# EAGLE board shield9Routed (EAGLE 8.7.1)
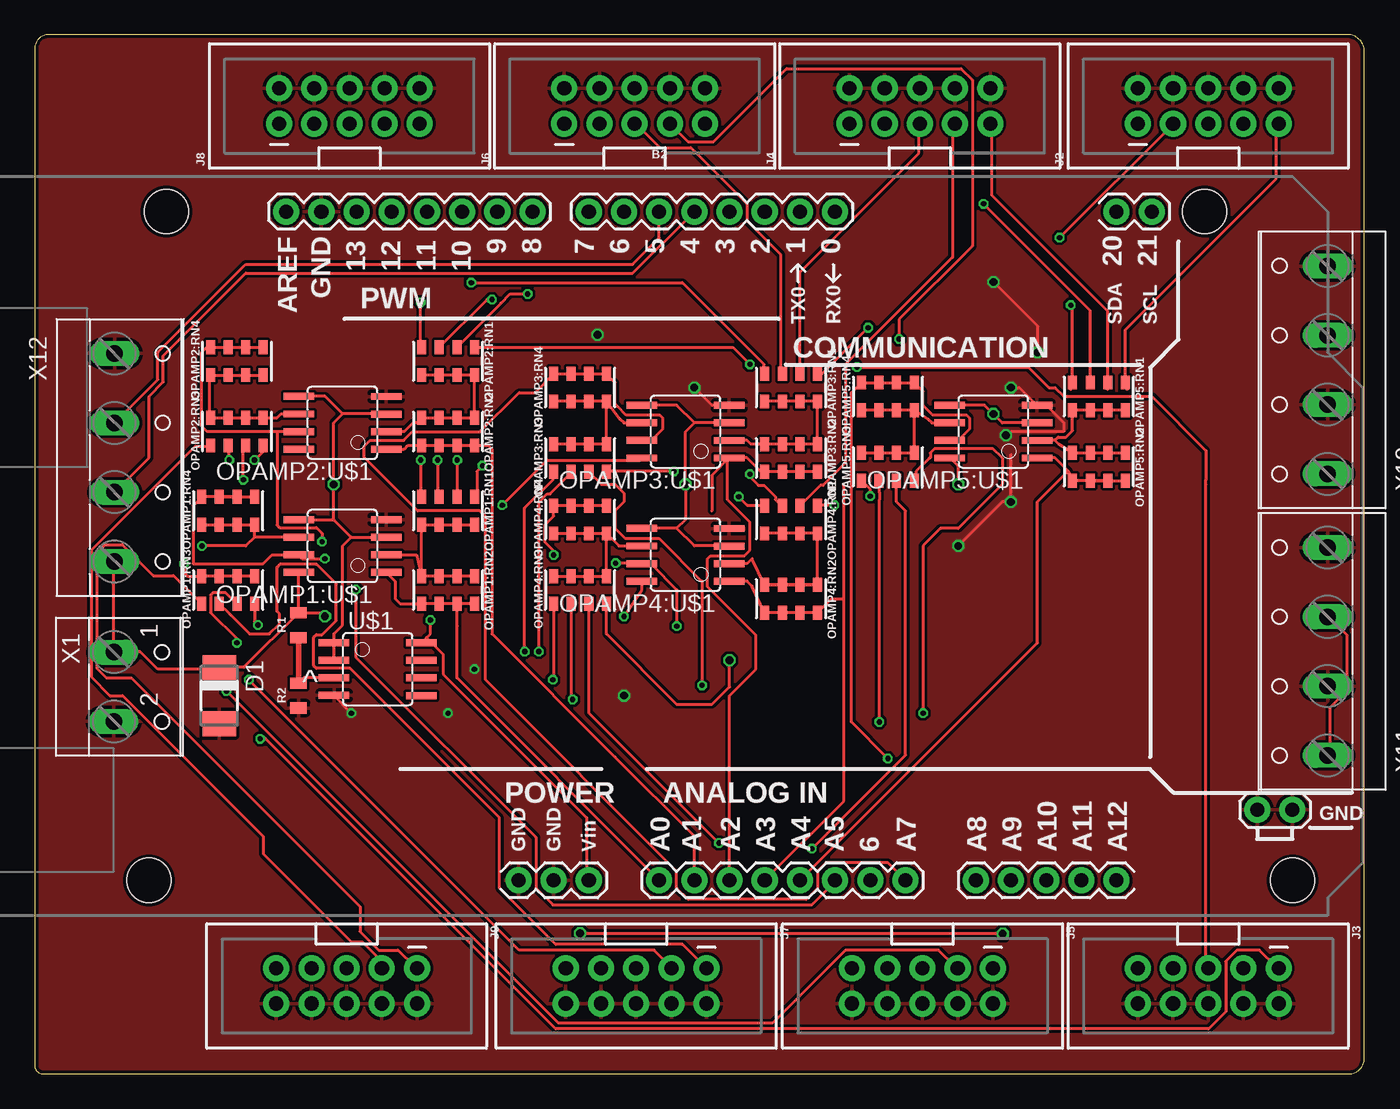
[diagram p0: board, top side]
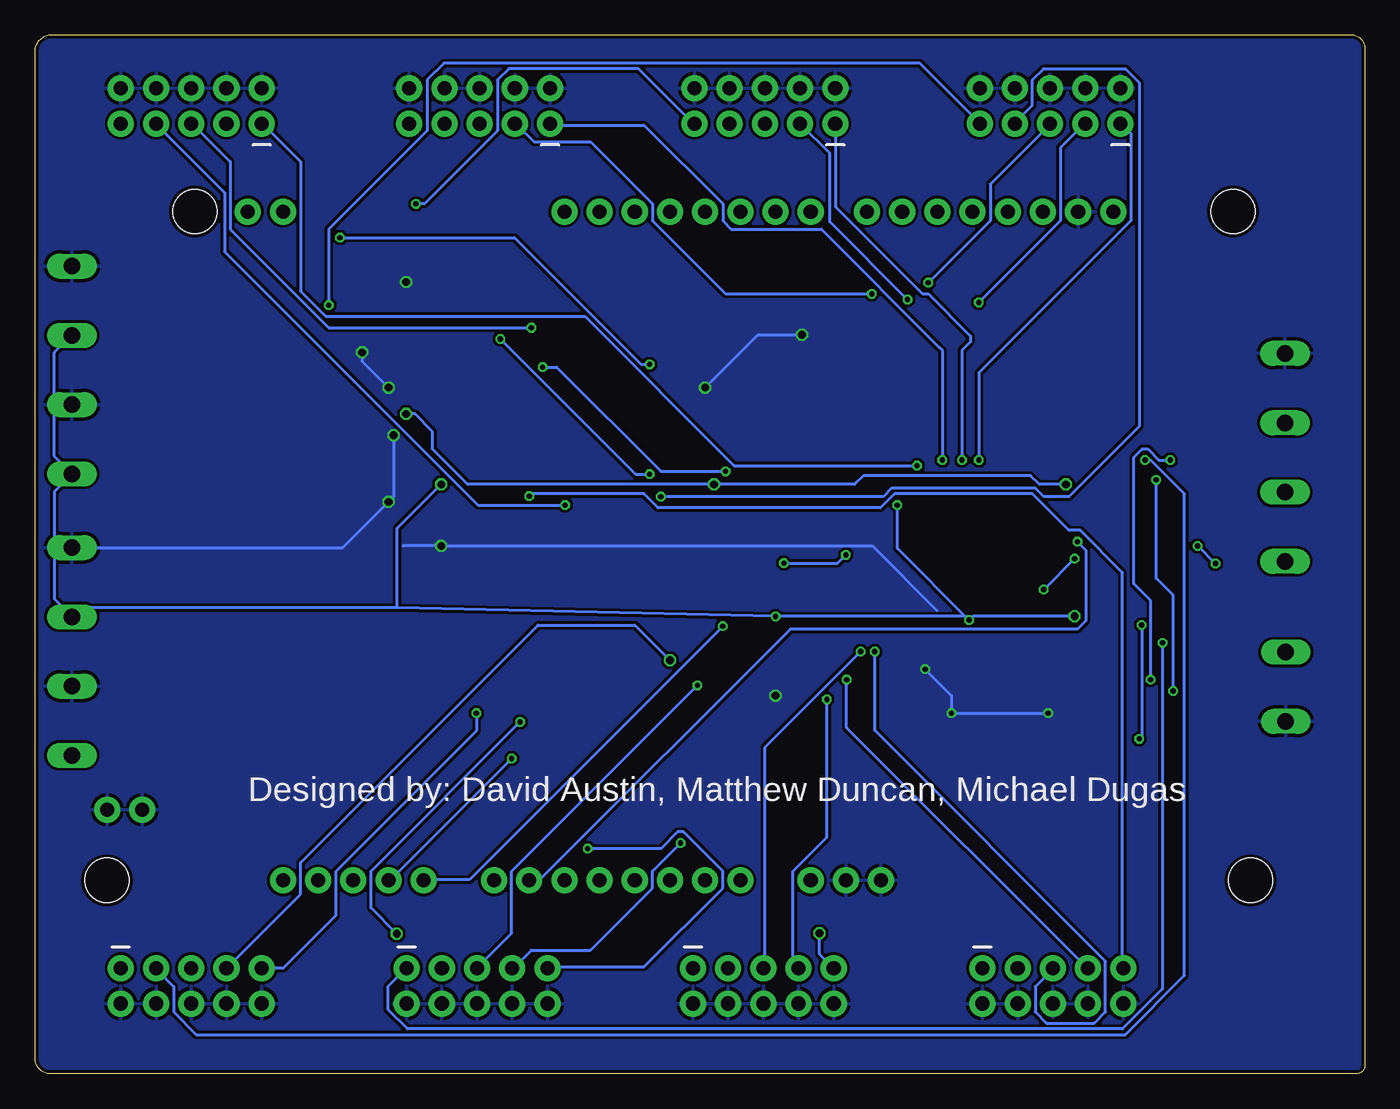
[diagram p1: board, bottom side, seen from below]

Size 96 x 75 mm. Coordinates in mm from the lower left corner, seen from the top.
Outline: 0,74 0,0.64 arc90 0.64,0 94.87,0 arc90 96,1.13 96,73.78 arc90 94.78,75 1,75 arc90 0,74
Copper layers (1*16): Top 0.035mm / dielectric 1.5mm / Bottom 0.035mm
Design rules "Dirty8TS *": minimum track width 5mil, minimum drill 12mil, track to track 8mil, track to pad 8mil, pad to pad 8mil, via to via 8mil, smd to smd 0mil, copper to edge 10mil, drill to drill 10mil, minimum pad ring 10mil, minimum via ring 6mil, stop-mask expansion 2mil, vias tented up to drill 25mil, thermal gap 10mil
Net classes: 0 default: width 0.203 mm, drill 0.381 mm, clearance 0.203 mm

## Footprints (pad centres in the part's own frame; a part is rotated, then mirrored left to right if it is on the bottom)
ARDUINO_MEGA_EDIT = drill 1.016 pad 1.88: 0 13.97,24.13; 1 11.43,24.13; 2 8.89,24.13; 3 6.35,24.13; 4 3.81,24.13; 5 1.27,24.13; 6 -1.27,24.13; 7 -3.81,24.13; 8 -7.874,24.13; 9 -10.414,24.13; 10 -12.954,24.13; 11 -15.494,24.13; 12 -18.034,24.13; 13 -20.574,24.13; 20 34.29,24.13; 21 36.83,24.13; A0 1.27,-24.13; A1 3.81,-24.13; A2 6.35,-24.13; A3 8.89,-24.13; A4 11.43,-24.13; A5 13.97,-24.13; A6 16.51,-24.13; A7 19.05,-24.13; A8 24.13,-24.13; A9 26.67,-24.13; A10 29.21,-24.13; A11 31.75,-24.13; A12 34.29,-24.13; AREF -25.654,24.13; GND@0 -8.89,-24.13; GND@1 -6.35,-24.13; GND@2 44.45,-19.05; GND@3 46.99,-19.05; GND@4 -23.114,24.13; VIN -3.81,-24.13 | hole 3.2: -34.29,24.13; -35.56,-24.13; 40.64,24.13; 46.99,-24.13
DO-214AC = smd 1.8 x 2.4: A 2.025,0; C -2.025,0
2X5-SHROUDED = drill 1.016 pad 1.88: 1 -1.27,5.08; 2 1.27,5.08; 3 -1.27,2.54; 4 1.27,2.54; 5 -1.27,0; 6 1.27,0; 7 -1.27,-2.54; 8 1.27,-2.54; 9 -1.27,-5.08; 10 1.27,-5.08
0805-ARV_EDIT10K = smd 0.65 x 1: 1 -1.905,-1; 2 -0.635,-1; 3 0.635,-1; 4 1.905,-1; 5 1.905,1; 6 0.635,1; 7 -0.635,1; 8 -1.905,1
SOIC8 = smd 0.5 x 2.2: 1 -1.905,-3.154; 2 -0.645,-3.154; 3 0.625,-3.154; 4 1.895,-3.154; 5 1.905,3.154; 6 0.635,3.154; 7 -0.635,3.154; 8 -1.905,3.154
0805 = smd 0.8 x 1.2: 1 -0.9,0; 2 0.9,0
W237-102 = drill 1.194 long: 1 -2.5,-1.27; 2 2.5,-1.27
W237-4 = drill 1.194 long: 1 -7.5,-1.27; 2 -2.5,-1.27; 3 2.5,-1.27; 4 7.5,-1.27

## Placement (x,y rotation side)
B2  ARDUINO_MEGA_R3_EDIT  [ARDUINO_MEGA_EDIT]  43.81,38.1 0 top
D1  [DO-214AC]  13.34,27.3 270 top
J2  AVR_SPI_PROG_5X2_NEWPTH2  [2X5-SHROUDED]  84.72,69.85 90 top
J3  AVR_SPI_PROG_5X2_NEWPTH2  [2X5-SHROUDED]  84.72,6.35 270 top
J4  AVR_SPI_PROG_5X2_NEWPTH2  [2X5-SHROUDED]  63.91,69.85 90 top
J5  AVR_SPI_PROG_5X2_NEWPTH2  [2X5-SHROUDED]  64.09,6.35 270 top
J6  AVR_SPI_PROG_5X2_NEWPTH2  [2X5-SHROUDED]  43.31,69.85 90 top
J7  AVR_SPI_PROG_5X2_NEWPTH2  [2X5-SHROUDED]  43.42,6.35 270 top
J8  AVR_SPI_PROG_5X2_NEWPTH2  [2X5-SHROUDED]  22.73,69.85 90 top
J9  AVR_SPI_PROG_5X2_NEWPTH2  [2X5-SHROUDED]  22.52,6.35 270 top
OPAMP1:RN1  10k  [0805-ARV_EDIT10K]  29.84,40.64 180 top
OPAMP1:RN2  10k  [0805-ARV_EDIT10K]  29.84,34.92 180 top
OPAMP1:RN3  10k  [0805-ARV_EDIT10K]  13.97,34.92 0 top
OPAMP1:RN4  10k  [0805-ARV_EDIT10K]  13.97,40.64 0 top
OPAMP1:U$1  MCP6002SMT  [SOIC8]  22.23,38.1 90 top
OPAMP2:RN1  10k  [0805-ARV_EDIT10K]  29.84,51.44 180 top
OPAMP2:RN2  10k  [0805-ARV_EDIT10K]  29.84,46.35 180 top
OPAMP2:RN3  10k  [0805-ARV_EDIT10K]  14.61,46.35 0 top
OPAMP2:RN4  10k  [0805-ARV_EDIT10K]  14.61,51.44 0 top
OPAMP2:U$1  MCP6002SMT  [SOIC8]  22.23,46.99 90 top
OPAMP3:RN1  10k  [0805-ARV_EDIT10K]  54.61,49.53 180 top
OPAMP3:RN2  10k  [0805-ARV_EDIT10K]  54.61,44.45 180 top
OPAMP3:RN3  10k  [0805-ARV_EDIT10K]  39.37,44.45 0 top
OPAMP3:RN4  10k  [0805-ARV_EDIT10K]  39.37,49.53 0 top
OPAMP3:U$1  MCP6002SMT  [SOIC8]  46.99,46.35 90 top
OPAMP4:RN1  10k  [0805-ARV_EDIT10K]  54.61,40.01 180 top
OPAMP4:RN2  10k  [0805-ARV_EDIT10K]  54.61,34.29 180 top
OPAMP4:RN3  10k  [0805-ARV_EDIT10K]  39.37,34.92 0 top
OPAMP4:RN4  10k  [0805-ARV_EDIT10K]  39.37,40.01 0 top
OPAMP4:U$1  MCP6002SMT  [SOIC8]  46.99,37.47 90 top
OPAMP5:RN1  10k  [0805-ARV_EDIT10K]  76.83,48.9 180 top
OPAMP5:RN2  10k  [0805-ARV_EDIT10K]  76.83,43.81 180 top
OPAMP5:RN3  10k  [0805-ARV_EDIT10K]  61.59,43.81 0 top
OPAMP5:RN4  10k  [0805-ARV_EDIT10K]  61.59,48.9 0 top
OPAMP5:U$1  MCP6002SMT  [SOIC8]  69.22,46.35 90 top
R1  1k  [0805]  19.05,32.38 90 top
R2  1k  [0805]  19.05,27.3 90 top
U$1  MCP6002SMT  [SOIC8]  24.77,29.21 270 top
X1  [W237-102]  6.99,27.94 270 top
X10  [W237-4]  92.08,50.8 90 top
X11  [W237-4]  92.08,30.48 90 top
X12  [W237-4]  7.04,44.49 270 top

## Library data of the parts
B2 = SparkFun-Boards
D1 = diode
J2-J9 = SparkFun-Connectors; PROD_ID: CONN-08671; SF_ID: PRT-08506
OPAMP1:RN1-OPAMP1:RN4 OPAMP2:RN1-OPAMP2:RN4 OPAMP3:RN1-OPAMP3:RN4 OPAMP4:RN1-OPAMP4:RN4 OPAMP5:RN1-OPAMP5:RN4 R1 R2 = SparkFun-Resistors
OPAMP1:U$1 OPAMP2:U$1 OPAMP3:U$1 OPAMP4:U$1 OPAMP5:U$1 U$1 = adam - ics
X1 = con-wago-500; MPN: 237-102; OC_FARNELL: unknown; OC_NEWARK: 70K9898
X10-X12 = con-wago-500; OC_FARNELL: unknown; OC_NEWARK: unknown

## Nets
+5V: B2.VIN D1.C OPAMP1:U$1.8 OPAMP3:U$1.8 OPAMP4:U$1.8 OPAMP5:U$1.8 R1.2 U$1.8 X1.1 X10.1 X10.3 X11.1 X11.3 X12.4
A1O: B2.A0 OPAMP1:RN2.5 OPAMP1:RN2.6 OPAMP1:RN2.7 OPAMP1:RN2.8 OPAMP1:U$1.1
A2O: B2.A1 OPAMP2:RN2.5 OPAMP2:RN2.6 OPAMP2:RN2.7 OPAMP2:RN2.8 OPAMP2:U$1.1
A3O: B2.A2 OPAMP3:RN2.5 OPAMP3:RN2.6 OPAMP3:RN2.7 OPAMP3:RN2.8 OPAMP3:U$1.1
A4O: B2.A3 OPAMP4:RN2.5 OPAMP4:RN2.6 OPAMP4:RN2.7 OPAMP4:RN2.8 OPAMP4:U$1.1
A5O: B2.A4 OPAMP5:RN2.5 OPAMP5:RN2.6 OPAMP5:RN2.7 OPAMP5:RN2.8 OPAMP5:U$1.1
A6O: B2.A5 OPAMP1:RN4.5 OPAMP1:RN4.6 OPAMP1:RN4.7 OPAMP1:RN4.8 OPAMP1:U$1.7
A7O: B2.A6 OPAMP2:RN4.5 OPAMP2:RN4.6 OPAMP2:RN4.7 OPAMP2:RN4.8 OPAMP2:U$1.7
A8O: B2.A7 OPAMP3:RN4.5 OPAMP3:RN4.6 OPAMP3:RN4.7 OPAMP3:RN4.8 OPAMP3:U$1.7
A9O: B2.A8 OPAMP4:RN4.5 OPAMP4:RN4.6 OPAMP4:RN4.7 OPAMP4:RN4.8 OPAMP4:U$1.7
A10O: B2.A9 OPAMP5:RN4.5 OPAMP5:RN4.6 OPAMP5:RN4.7 OPAMP5:RN4.8 OPAMP5:U$1.7
CI: B2.4 X12.3
DI: B2.5 X12.2
GND: B2.GND@0 B2.GND@1 B2.GND@2 B2.GND@3 B2.GND@4 D1.A J2.2 J2.4 J2.6 J2.8 J2.10 J3.2 J3.4 J3.6 J3.8 J3.10 J4.2 J4.4 J4.6 J4.8 J4.10 J5.2 J5.4 J5.6 J5.8 J5.10 J6.2 J6.4 J6.6 J6.8 J6.10 J7.2 J7.4 J7.6 J7.8 J7.10 J8.2 J8.4 J8.6 J8.8 J8.10 J9.2 J9.4 J9.6 J9.8 J9.10 OPAMP1:U$1.4 OPAMP2:U$1.4 OPAMP3:U$1.4 OPAMP4:U$1.4 OPAMP5:U$1.4 R2.1 U$1.4 X1.2 X10.2 X10.4 X11.2 X11.4 X12.1
N$2: R1.1 R2.2 U$1.3
OPAMP1:N$1: OPAMP1:RN3.5 OPAMP1:RN3.6 OPAMP1:RN3.7 OPAMP1:RN3.8 OPAMP1:RN4.1 OPAMP1:RN4.2 OPAMP1:RN4.3 OPAMP1:RN4.4 OPAMP1:U$1.6
OPAMP1:N$2: OPAMP1:RN1.5 OPAMP1:RN1.6 OPAMP1:RN1.7 OPAMP1:RN1.8 OPAMP1:RN2.1 OPAMP1:RN2.2 OPAMP1:RN2.3 OPAMP1:RN2.4 OPAMP1:U$1.2
OPAMP2:N$1: OPAMP2:RN3.5 OPAMP2:RN3.6 OPAMP2:RN3.7 OPAMP2:RN3.8 OPAMP2:RN4.1 OPAMP2:RN4.2 OPAMP2:RN4.3 OPAMP2:RN4.4 OPAMP2:U$1.6
OPAMP2:N$2: OPAMP2:RN1.5 OPAMP2:RN1.6 OPAMP2:RN1.7 OPAMP2:RN1.8 OPAMP2:RN2.1 OPAMP2:RN2.2 OPAMP2:RN2.3 OPAMP2:RN2.4 OPAMP2:U$1.2
OPAMP3:N$1: OPAMP3:RN3.5 OPAMP3:RN3.6 OPAMP3:RN3.7 OPAMP3:RN3.8 OPAMP3:RN4.1 OPAMP3:RN4.2 OPAMP3:RN4.3 OPAMP3:RN4.4 OPAMP3:U$1.6
OPAMP3:N$2: OPAMP3:RN1.5 OPAMP3:RN1.6 OPAMP3:RN1.7 OPAMP3:RN1.8 OPAMP3:RN2.1 OPAMP3:RN2.2 OPAMP3:RN2.3 OPAMP3:RN2.4 OPAMP3:U$1.2
OPAMP4:N$1: OPAMP4:RN3.5 OPAMP4:RN3.6 OPAMP4:RN3.7 OPAMP4:RN3.8 OPAMP4:RN4.1 OPAMP4:RN4.2 OPAMP4:RN4.3 OPAMP4:RN4.4 OPAMP4:U$1.6
OPAMP4:N$2: OPAMP4:RN1.5 OPAMP4:RN1.6 OPAMP4:RN1.7 OPAMP4:RN1.8 OPAMP4:RN2.1 OPAMP4:RN2.2 OPAMP4:RN2.3 OPAMP4:RN2.4 OPAMP4:U$1.2
OPAMP5:N$1: OPAMP5:RN3.5 OPAMP5:RN3.6 OPAMP5:RN3.7 OPAMP5:RN3.8 OPAMP5:RN4.1 OPAMP5:RN4.2 OPAMP5:RN4.3 OPAMP5:RN4.4 OPAMP5:U$1.6
OPAMP5:N$2: OPAMP5:RN1.5 OPAMP5:RN1.6 OPAMP5:RN1.7 OPAMP5:RN1.8 OPAMP5:RN2.1 OPAMP5:RN2.2 OPAMP5:RN2.3 OPAMP5:RN2.4 OPAMP5:U$1.2
S1A: J2.1 OPAMP1:RN1.1
S1B: J3.1 OPAMP1:RN3.4
S2A: J2.3 OPAMP2:RN1.1
S2B: J3.3 OPAMP2:RN3.4
S3A: J2.5 OPAMP3:RN1.1
S3B: J3.5 OPAMP3:RN3.4
S4A: J2.7 OPAMP4:RN1.1
S4B: J3.7 OPAMP4:RN3.4
S5A: J2.9 OPAMP5:RN1.1
S5B: J3.9 OPAMP5:RN3.4
S6A: J4.1 OPAMP1:RN1.2
S6B: J5.1 OPAMP1:RN3.3
S7A: J4.3 OPAMP2:RN1.2
S7B: J5.3 OPAMP2:RN3.3
S8A: J4.5 OPAMP3:RN1.2
S8B: J5.5 OPAMP3:RN3.3
S9A: J4.7 OPAMP4:RN1.2
S9B: J5.7 OPAMP4:RN3.3
S10A: J4.9 OPAMP5:RN1.2
S10B: J5.9 OPAMP5:RN3.3
S11A: J6.1 OPAMP1:RN1.3
S11B: J7.1 OPAMP1:RN3.2
S12A: J6.3 OPAMP2:RN1.3
S12B: J7.3 OPAMP2:RN3.2
S13A: J6.5 OPAMP3:RN1.3
S13B: J7.5 OPAMP3:RN3.2
S14A: J6.7 OPAMP4:RN1.3
S14B: J7.7 OPAMP4:RN3.2
S15A: J6.9 OPAMP5:RN1.3
S15B: J7.9 OPAMP5:RN3.2
S16A: J8.1 OPAMP1:RN1.4
S16B: J9.1 OPAMP1:RN3.1
S17A: J8.3 OPAMP2:RN1.4
S17B: J9.3 OPAMP2:RN3.1
S18A: J8.5 OPAMP3:RN1.4
S18B: J9.5 OPAMP3:RN3.1
S19A: J8.7 OPAMP4:RN1.4
S19B: J9.7 OPAMP4:RN3.1
S20A: J8.9 OPAMP5:RN1.4
S20B: J9.9 OPAMP5:RN3.1
VCC: OPAMP2:U$1.8
VREF: OPAMP1:U$1.3 OPAMP1:U$1.5 OPAMP2:U$1.3 OPAMP2:U$1.5 OPAMP3:U$1.3 OPAMP3:U$1.5 OPAMP4:U$1.3 OPAMP4:U$1.5 OPAMP5:U$1.3 OPAMP5:U$1.5 U$1.1 U$1.2

## Tracks (layer width: path | path; a pad name or v marks a point on that pad's centre or on a via)
+5V  (via drill 0.38, 0.56)
  Top 0.203: R1.2 15.1,29.33 D1.C 13.21,29.21 8.89,29.21 7.62,30.48 5.75,30.48 X1.1 5.71,36.94 X12.4 | R1.2 19.07,33.31 OPAMP1:U$1.8 | v42.55,33.02 43.84,34.95 OPAMP4:U$1.8 | v66.67,42.55 66.67,43.84 OPAMP5:U$1.8 | U$1.8 28.29,31.48 | 28.29,31.48 28.57,31.77 v28.57,32.75 | R1.2 20.69,33.28 v20.95,33.02 | v33.76,41.05 37.01,44.3 43.71,44.3 OPAMP3:U$1.8 | X11.1 93.5,23.16 93.5,26.42 94.72,27.64 94.72,31.7 93.5,32.92 X11.3 | 28.29,31.48 29.49,30.28 29.49,28.85 39.85,18.49 39.85,14.02 B2.VIN | 28.27,31.5 28.29,31.48
  Top 0.406: 12.91,29.75 D1.C
  Bottom 0.203: 69.85,33.66 v42.55,33.02 28.84,33.02 v28.57,32.75 | 69.85,33.66 92.67,33.66 93.33,33 | 93.33,33 X11.3 | 93.33,33 94.61,34.29 94.61,42.03 X10.1 94.61,44.57 94.61,52.07 93.39,53.3 X10.3 | 69.85,33.66 69.85,39.37 v66.67,42.55 | v20.95,33.02 28.31,33.02 v28.57,32.75 | v28.57,32.75 33.76,37.94 v33.76,41.05
A1O
  Top 0.203: B2.A0 30.48,28.57 30.48,32.31 | OPAMP1:RN2.8 OPAMP1:RN2.7 | OPAMP1:RN2.7 OPAMP1:RN2.6 OPAMP1:RN2.5 26.4,33.92 26.04,34.29 26.04,35.54 OPAMP1:U$1.1 | 30.5,32.31 30.48,32.31 | 30.48,32.31 OPAMP1:RN2.7
A2O
  Top 0.203: B2.A1 47.62,17.14 41.91,22.86 33.02,31.75 33.02,45.09 32.75,45.35 OPAMP2:RN2.8 OPAMP2:RN2.7 OPAMP2:RN2.6 OPAMP2:RN2.5 26.94,45.35 26.67,45.09 OPAMP2:U$1.1
A3O
  Top 0.203: B2.A2 50.16,27.3 52.07,29.21 52.07,31.67 48.59,35.15 48.59,37.19 48.79,37.39 51.23,37.39 51.64,37.8 51.64,39.83 50.01,41.45 50.01,44.3 OPAMP3:U$1.1 | OPAMP3:RN2.8 OPAMP3:RN2.7 OPAMP3:RN2.6 OPAMP3:RN2.5 52.44,43.45 51.44,44.45 OPAMP3:U$1.1 | OPAMP3:U$1.1 48.9,43.2 48.9,40.64
A4O
  Top 0.203: B2.A3 58.42,19.68 58.42,34.29 | 58.42,34.29 58.42,42.55 | OPAMP4:U$1.1 51.44,35.56 51.8,35.2 OPAMP4:RN2.5 OPAMP4:RN2.6 OPAMP4:RN2.7 OPAMP4:RN2.8 57.52,34.29 58.42,34.29
A5O
  Top 0.203: B2.A4 72.39,31.11 72.39,41.27 74.56,43.45 OPAMP5:RN2.5 | OPAMP5:RN2.7 OPAMP5:RN2.5 | OPAMP5:RN2.6 OPAMP5:RN2.7 | OPAMP5:RN2.7 OPAMP5:RN2.8 | OPAMP5:RN2.5 74.66,43.45 73.66,44.45 OPAMP5:U$1.1
A6O  (via drill 0.38)
  Top 0.203: OPAMP1:RN4.7 OPAMP1:RN4.5 | OPAMP1:RN4.7 OPAMP1:RN4.8 11.43,41.01 11.43,36.83 16.51,36.83 17.14,37.47 OPAMP1:U$1.7 19.13,37.39 19.33,37.19 v20.95,37.19 | OPAMP1:RN4.6 OPAMP1:RN4.7 | v23.19,34.95 23.19,30.07 36.2,17.07 36.2,13.41 37.41,12.19 56.11,12.19 57.73,13.82 B2.A5
  Bottom 0.203: v20.95,37.19 v23.19,34.95
A7O  (via drill 0.38)
  Top 0.203: OPAMP2:RN4.5 OPAMP2:RN4.6 OPAMP2:RN4.7 OPAMP2:RN4.8 12.43,52.44 12.06,52.07 12.06,46.73 12.44,46.35 17.5,46.35 | OPAMP2:U$1.7 17.5,46.35 | v20.75,38.41 20.75,39.01 20.34,39.42 17.7,39.42 17.5,39.62 17.5,46.35
  Bottom 0.203: v20.75,38.41 20.14,37.8 20.14,32.72 20.75,32.11 41.48,32.11 59.56,14.02 60.17,14.02 B2.A6
A8O
  Top 0.203: OPAMP3:U$1.7 44.53,45.72 45.34,46.53 45.34,47.35 45.14,47.55 42.7,47.55 42.07,48.17 41.91,48.38 41.91,49.9 OPAMP3:RN4.5 OPAMP3:RN4.6 OPAMP3:RN4.7 OPAMP3:RN4.8 36.11,49.17 34.98,49.17 32.13,46.33 27.25,46.33 26.64,45.72 24.21,45.72 23.8,45.31 23.8,44.5 27.66,40.64 32.13,40.64 32.54,40.23 32.54,28.45 46.35,14.63 46.35,13.41 47.17,12.6 55.7,12.6 56.52,13.41 56.52,14.63 57.12,15.24 61.59,15.24 B2.A7
A9O  (via drill 0.38)
  Top 0.203: OPAMP4:RN4.5 OPAMP4:RN4.6 OPAMP4:RN4.7 OPAMP4:RN4.8 37.47,40.26 36.84,39.63 36.84,38.38 37.47,37.75 v37.47,37.45 | v46.35,32.31 46.35,34.95 44.53,36.78 43.92,36.78 OPAMP4:U$1.7 43.81,36.86 v41.94,36.86
  Bottom 0.203: v46.35,32.31 64.64,14.02 67.89,14.02 B2.A8 | v41.94,36.86 38.06,36.86 v37.47,37.45
A10O  (via drill 0.38)
  Top 0.203: OPAMP5:U$1.7 66.67,45.72 67.49,46.53 67.49,47.35 67.28,47.55 64.85,47.55 64.14,48.26 64.14,49.26 OPAMP5:RN4.5 OPAMP5:RN4.6 OPAMP5:RN4.7 OPAMP5:RN4.8 58.95,49.16 58.95,25.4 v61.59,22.76
  Bottom 0.203: v61.59,22.76 70.33,14.02 B2.A9
CI
  Top 0.203: X12.3 8.26,44.48 8.26,48.9 9.3,49.94 9.3,51.84 15.24,57.78 43.18,57.78 B2.4
DI
  Top 0.203: X12.2 8.89,50.11 8.89,52.07 15.24,58.42 43.18,58.42 45.09,60.33 B2.5
GND  (via drill 0.38, 0.56)
  Top 0.203: v22.86,26.04 21.61,27.28 U$1.4 | v66.67,38.1 69.85,41.27 v70.48,41.27 70.48,44.7 | v69.22,57.15 72.39,53.98 v72.39,52.07 | v70.48,49.53 71.09,49.53 OPAMP5:U$1.4 73.03,48.25 74.3,46.99 74.3,46.35 70.48,46.35 70.22,46.09 v70.12,46.09 | OPAMP3:U$1.4 48.91,48.25 v47.62,49.53
  Bottom 0.203: v22.86,26.04 v29.84,26.04 29.84,27.3 v31.75,29.21 | 69.44,38.1 v66.67,38.1 35.56,38.1 30.89,33.43 | X11.4 73.78,37.98 v70.48,41.27 70.12,41.64 v70.12,46.09 | v72.39,52.07 72.39,51.44 v70.48,49.53 | v47.62,49.53 43.81,53.34 v40.64,53.34
  other vias: 42.55,27.3
  pour Top: 0,82.55 99.06,82.55 99.06,-1.27 -4.45,-1.27 -4.45,82.55
  pour Bottom: -6.35,84.45 100.97,84.45 100.97,83.19 100.97,-4.45 -6.35,-4.45 -6.35,83.82
N$2
  Top 0.203: U$1.3 21.6,28.57 19.42,28.57 R2.2
  Top 0.406: R2.2 R1.1
OPAMP1:N$1  (via drill 0.38)
  Top 0.203: OPAMP1:U$1.6 15.88,38.73 | 15.88,38.73 OPAMP1:RN4.4 OPAMP1:RN4.3 OPAMP1:RN4.2 OPAMP1:RN4.1 | OPAMP1:RN3.5 OPAMP1:RN3.6 OPAMP1:RN3.7 OPAMP1:RN3.8 11.06,35.92 10.78,36.21 v10.78,36.83 | 15.88,38.73 15.24,38.1 v12.08,38.1
  Bottom 0.203: v12.08,38.1 12.05,38.1 v10.78,36.83
OPAMP1:N$2
  Top 0.203: OPAMP1:U$1.2 27.57,37.45 OPAMP1:RN2.4 | OPAMP1:RN2.4 OPAMP1:RN1.5 OPAMP1:RN1.6 OPAMP1:RN1.7 OPAMP1:RN1.8 | OPAMP1:RN2.1 OPAMP1:RN2.2 OPAMP1:RN2.3 OPAMP1:RN2.4
OPAMP2:N$1
  Top 0.203: OPAMP2:RN4.4 OPAMP2:RN4.3 OPAMP2:RN4.2 OPAMP2:RN4.1 12.62,50.36 12.62,48.97 12.62,48.9 12.62,47.55 OPAMP2:RN3.8 OPAMP2:RN3.7 OPAMP2:RN3.6 OPAMP2:RN3.5 17.51,47.35 17.78,47.62 OPAMP2:U$1.6
OPAMP2:N$2
  Top 0.203: OPAMP2:RN1.5 OPAMP2:RN1.6 OPAMP2:RN1.7 OPAMP2:RN1.8 OPAMP2:RN2.1 OPAMP2:RN2.2 OPAMP2:RN2.3 OPAMP2:RN2.4 27.57,46.99 27.3,46.99 26.66,46.34 OPAMP2:U$1.2
OPAMP3:N$1
  Top 0.203: OPAMP3:RN3.8 OPAMP3:RN3.7 OPAMP3:RN3.6 OPAMP3:RN3.5 OPAMP3:RN4.4 | OPAMP3:RN4.4 OPAMP3:RN4.3 OPAMP3:RN4.2 OPAMP3:RN4.1 | OPAMP3:RN4.4 42.27,47.26 42.55,46.99 OPAMP3:U$1.6
OPAMP3:N$2
  Top 0.203: OPAMP3:RN1.5 OPAMP3:RN1.6 OPAMP3:RN1.7 OPAMP3:RN1.8 OPAMP3:RN2.1 OPAMP3:RN2.2 OPAMP3:RN2.3 OPAMP3:RN2.4 51.7,45.45 51.44,45.72 50.15,45.72 OPAMP3:U$1.2
OPAMP4:N$1
  Top 0.203: OPAMP4:RN4.1 OPAMP4:RN4.2 OPAMP4:RN4.3 OPAMP4:RN4.4 | OPAMP4:RN3.8 OPAMP4:RN3.7 OPAMP4:RN3.6 OPAMP4:RN3.5 OPAMP4:RN4.4 | OPAMP4:RN4.4 42.18,38.1 OPAMP4:U$1.6
OPAMP4:N$2
  Top 0.203: OPAMP4:RN2.1 OPAMP4:RN2.2 OPAMP4:RN2.3 OPAMP4:RN2.4 | OPAMP4:RN2.4 OPAMP4:RN2.1 | OPAMP4:RN2.1 OPAMP4:RN1.8 OPAMP4:RN1.7 OPAMP4:RN1.6 OPAMP4:RN1.5 | OPAMP4:RN2.4 51.8,37.2 51.42,36.82 OPAMP4:U$1.2
OPAMP5:N$1
  Top 0.203: OPAMP5:RN3.8 OPAMP5:RN3.7 OPAMP5:RN3.6 OPAMP5:RN3.5 OPAMP5:RN4.4 | OPAMP5:RN4.4 OPAMP5:RN4.3 OPAMP5:RN4.2 OPAMP5:RN4.1 | OPAMP5:U$1.6 64.77,46.99 64.5,47.26 OPAMP5:RN4.4
OPAMP5:N$2
  Top 0.203: OPAMP5:RN1.8 OPAMP5:RN1.7 OPAMP5:RN1.6 OPAMP5:RN1.5 74.93,46.41 74.46,45.95 73.89,45.95 73.66,45.72 | OPAMP5:RN2.1 OPAMP5:RN2.2 OPAMP5:RN2.3 OPAMP5:RN2.4 73.93,45.45 73.66,45.72 | 73.66,45.72 OPAMP5:U$1.2
S1A  (via drill 0.38)
  Top 0.203: v32.33,43.89 31.93,43.48 31.93,41.66 OPAMP1:RN1.1
  Bottom 0.203: v32.33,43.89 45.54,43.89 56.31,54.66 75.01,54.66 76.83,56.49 76.83,65.84 79.48,68.48 J2.1
S1B  (via drill 0.38)
  Top 0.203: v16.28,24.18 16.69,24.18 37.62,3.25 84.76,3.25 85.98,4.47 85.98,8.13 86.79,8.94 88.42,8.94 89.64,7.72 J3.1 | OPAMP1:RN3.4 15.88,32.64 v16.12,32.4
  Bottom 0.203: v16.12,32.4 16.12,24.35 v16.28,24.18
S2A  (via drill 0.38)
  Top 0.203: v73.99,60.35 82.12,68.48 J2.3 | OPAMP2:RN1.1 50.41,52.44 v51.64,51.21
  Bottom 0.203: v51.64,51.21 52.25,51.21 61.39,60.35 v73.99,60.35
S2B  (via drill 0.38)
  Top 0.203: v15.88,44.3 16.48,44.91 16.48,45.31 OPAMP2:RN3.4
  Bottom 0.203: v15.88,44.3 15.47,44.3 13.03,41.86 13.03,7.11 17.3,2.85 84.35,2.85 85.98,4.47 85.98,6.3 87.2,7.52 J3.3
S3A  (via drill 0.38)
  Top 0.203: 56.52,50.19 OPAMP3:RN1.1 56.85,50.53 v60.17,53.85
  Bottom 0.203: v60.17,53.85 74.8,53.85 81.92,60.96 81.92,65.84 84.56,68.48 J2.5
S3B  (via drill 0.38)
  Top 0.203: v46.15,43.48 41.27,43.48 OPAMP3:RN3.4 | v59.36,51 71.75,51 73.23,49.53 73.66,49.53 74.3,48.9 80.64,48.9 84.56,44.98 84.56,42.88 84.56,42.55 84.56,7.72 J3.5
  Bottom 0.203: v46.15,43.48 50.83,43.48 58.34,51 v59.36,51
S4A  (via drill 0.38)
  Top 0.203: v57.73,41.05 56.52,41.05 OPAMP4:RN1.1
  Bottom 0.203: v57.73,41.05 64.03,41.05 82.32,59.33 82.32,63.6 87.2,68.48 J2.7
S4B  (via drill 0.56)
  Top 0.203: OPAMP4:RN3.4 41.27,31.75 46.35,26.67 48.9,26.67 50.16,27.94 v50.16,29.84
  Bottom 0.203: J3.7 76.83,12.97 76.83,15.24 59.69,32.38 52.7,32.38 v50.16,29.84
S5A
  Top 0.203: 78.87,49.38 OPAMP5:RN1.1 78.74,53.72 89.64,64.62 89.64,68.48 J2.9
S5B  (via drill 0.38)
  Top 0.203: OPAMP5:RN3.4 63.63,43.48 64.66,44.51 | 79.48,7.72 J3.9 | v64.14,26.04 64.14,38.1 65.41,39.37 66.67,39.37 69.85,42.55 69.85,44.45 69.19,45.11 64.94,45.11 64.66,44.83 64.66,44.51 | 64.59,44.45 64.66,44.45 64.66,44.51
  Bottom 0.203: v64.14,26.04 64.14,24.77 74.3,14.61 74.3,11.43 78.11,7.62 J3.9
S6A  (via drill 0.38)
  Top 0.203: v30.5,44.3 30.5,41.66 OPAMP1:RN1.2
  Bottom 0.203: v30.5,44.3 30.5,52.22 30.73,52.45 39.24,60.96 45.74,60.96 46.35,61.57 46.35,62.79 52.05,68.48 58.75,68.48 J4.1
S6B  (via drill 0.38)
  Top 0.203: v14.61,31.11 14.61,31.4 12.71,33.3 12.71,34.55 12.88,34.73 13.79,34.73 14.59,33.92 OPAMP1:RN3.3
  Bottom 0.203: J5.1 69.32,7.52 70.54,6.3 70.54,4.67 69.11,3.25 17.5,3.25 14.61,6.15 v14.61,31.11
S7A  (via drill 0.38)
  Top 0.203: v35.59,56.29 34.33,56.29 33.67,55.62 33.67,55.61 33.29,55.23 33.28,55.23 OPAMP2:RN1.2
  Bottom 0.203: v35.59,56.29 46.15,56.29 51.44,61.57 51.44,62.79 55.91,67.26 59.97,67.26 61.19,68.48 J4.3
S7B  (via drill 0.38)
  Top 0.203: v15.06,42.88 15.06,45.31 OPAMP2:RN3.3 | v13.84,27.64 37.82,3.66 53.26,3.66 58.55,8.94 65.25,8.94 66.47,7.72 J5.3
  Bottom 0.203: v15.06,42.88 15.06,35.76 13.84,34.54 v13.84,27.64
S8A
  Top 0.203: J4.5 63.83,68.48 63.83,66.45 55.24,57.86 OPAMP3:RN1.2
S8B  (via drill 0.38)
  Top 0.203: v48.18,28.04 48.18,35.56 48.16,35.56 45.06,38.66 42.62,38.66 41.91,39.37 41.91,40.64 42.55,41.27 42.55,41.91 41.91,42.55 40.91,42.55 OPAMP3:RN3.3 40.06,43.28
  Bottom 0.203: v48.18,28.04 61.59,14.63 61.59,10.16 64.03,7.72 J5.5
S9A
  Top 0.203: OPAMP4:RN1.2 55.3,41.05 56.72,42.47 56.92,42.47 58.55,44.09 58.55,51.21 66.27,58.93 66.27,68.48 J4.7
S9B  (via drill 0.38)
  Top 0.203: OPAMP4:RN3.3 40.01,26.06 v49.4,16.66
  Bottom 0.203: v49.4,16.66 51.44,14.63 51.44,13.41 55.91,8.94 60.17,8.94 61.39,7.72 J5.7
S10A
  Top 0.203: 77.44,49.38 OPAMP5:RN1.2 77.47,55.04 69.11,63.4 69.11,68.48 J4.9
S10B  (via drill 0.38)
  Top 0.203: OPAMP5:RN3.3 62.23,41.27 62.87,40.64 62.87,23.01 v56.11,16.26
  Bottom 0.203: v56.11,16.26 50.83,16.26 49.61,17.48 49.2,17.48 46.35,14.63 46.35,13.41 52.05,7.72 58.95,7.72 J5.9
S11A  (via drill 0.38)
  Top 0.203: v29.08,44.3 29.08,41.66 OPAMP1:RN1.3
  Bottom 0.203: v29.08,44.3 29.08,52.22 28.47,52.83 28.47,53.24 31.52,56.29 31.93,56.29 38.23,62.59 38.23,68.48 J6.1
S11B
  Top 0.203: J7.1 48.39,7.72 46.76,9.35 37.62,9.35 33.55,13.41 33.55,18.49 22.78,29.26 20.34,29.26 20.14,29.46 20.14,31.5 20.34,31.7 20.75,31.7 21.77,32.72 21.77,35.36 20.34,36.78 17.7,36.78 17.5,36.58 17.5,33.38 17.68,33.2 17.68,32.49 16.94,31.75 15.51,31.75 14.14,33.12 14.11,33.16 OPAMP1:RN3.2
S12A  (via drill 0.38)
  Top 0.203: OPAMP2:RN1.3 32.66,55.88 v33.02,55.88
  Bottom 0.203: J6.3 40.66,68.48 38.63,66.45 38.63,61.49 v33.02,55.88
S12B  (via drill 0.38)
  Top 0.203: v14.05,44.3 14.05,45.31 OPAMP2:RN3.2 | v15.47,28.45 34.98,8.94 44.73,8.94 45.95,7.72 J7.3
  Bottom 0.203: v14.05,44.3 14.86,44.3 15.67,45.11 16.08,45.11 16.69,44.5 16.69,35.36 15.47,34.14 v15.47,28.45
S13A
  Top 0.203: J6.5 43.51,68.48 45.14,66.85 47.37,66.85 51.44,62.79 51.44,61.57 53.87,59.13 53.87,50.63 OPAMP3:RN1.3
S13B  (via drill 0.38)
  Top 0.203: v36.4,30.48 36.4,41.25 37.01,41.86 37.21,41.86 38.63,43.28 OPAMP3:RN3.2
  Bottom 0.203: v36.4,30.48 43.31,23.57 43.31,7.72 J7.5
S14A  (via drill 0.38)
  Top 0.203: v51.64,43.28 51.64,43.08 52.25,42.47 52.65,42.47 53.47,41.66 53.47,41.45 53.87,41.05 OPAMP4:RN1.3 | v62.41,53.03 62.41,54.46 67.69,59.74 67.69,71.73 66.88,72.54 54.28,72.54 49,67.26 47.17,67.26 45.95,68.48 J6.7
  Bottom 0.203: v51.64,43.28 52.65,43.28 v62.41,53.03
S14B  (via drill 0.38)
  Top 0.203: OPAMP4:RN3.2 38.73,27.13 v38.84,27.03
  Bottom 0.203: v38.84,27.03 38.84,17.07 41.27,14.63 41.27,7.92 41.07,7.72 J7.7
S15A  (via drill 0.38)
  Top 0.203: OPAMP5:RN1.3 76.2,55.09 v68.5,62.79
  Bottom 0.203: v68.5,62.79 67.89,62.79 62.61,68.07 62.61,71.73 61.8,72.54 52.45,72.54 48.59,68.68 J6.9
S15B  (via drill 0.38, 0.56)
  Top 0.203: v39.37,10.16 69.85,10.16 v69.89,10.12 | v60.98,25.4 60.96,25.43 60.96,41.41 60.97,41.43 60.97,41.96 60.96,41.98 OPAMP5:RN3.2
  Bottom 0.203: v60.98,25.4 71.75,14.63 71.75,11.99 v69.89,10.12 | 38.23,7.52 J7.9 39.37,8.64 v39.37,10.16
S16A  (via drill 0.38)
  Top 0.203: v27.86,44.3 27.86,41.66 OPAMP1:RN1.4
  Bottom 0.203: v27.86,44.3 27.86,50.6 16.89,61.57 16.89,67.87 17.5,68.48 J8.1
S16B
  Top 0.203: J9.1 27.46,7.72 26.24,8.94 24.82,8.94 23.5,10.26 23.5,12.06 6.99,28.57 5.18,28.57 4.5,29.26 4.5,37.59 5.11,38.2 6.33,38.2 8.56,35.97 10.02,35.97 OPAMP1:RN3.1
S17A  (via drill 0.38)
  Top 0.203: OPAMP2:RN1.4 27.86,52.51 v27.86,55.68
  Bottom 0.203: v27.86,55.68 21.97,61.57 21.97,66.85 20.34,68.48 J8.3
S17B
  Top 0.203: OPAMP2:RN3.1 12.62,45.31 11.61,45.31 4.09,37.8 4.09,28.65 5.44,27.3 6.35,27.3 16.51,17.14 16.51,15.88 22.86,9.53 23.66,9.53 25.07,8.12 J9.3 25.02,7.72
S18A  (via drill 0.38)
  Top 0.203: v31.52,57.1 46.76,57.1 52.65,51.21 52.65,50.58 OPAMP3:RN1.4
  Bottom 0.203: v31.52,57.1 27.05,61.57 27.05,64.21 22.78,68.48 J8.5
S18B  (via drill 0.38)
  Top 0.203: v35.38,30.48 35.38,40.84 37.41,42.88 37.41,43.28 OPAMP3:RN3.1
  Bottom 0.203: v35.38,30.48 35.38,24.79 18.72,8.13 18.72,4.47 19.53,3.66 22.99,3.66 23.8,4.47 23.8,6.3 22.58,7.52 J9.5
S19A  (via drill 0.38)
  Top 0.203: v50.83,41.66 51.44,41.05 52.65,41.05 OPAMP4:RN1.4
  Bottom 0.203: v50.83,41.66 34.77,41.66 34.16,42.27 23.8,42.27 23.19,41.66 21.36,41.66 16.28,46.74 16.28,71.53 17.3,72.54 23.19,72.54 24,71.73 24,69.9 25.22,68.68 J8.7
S19B  (via drill 0.38)
  Top 0.203: OPAMP4:RN3.1 37.47,28.5 v37.41,28.45
  Bottom 0.203: v37.41,28.45 37.41,24.99 20.14,7.72 J9.7
S20A  (via drill 0.38)
  Top 0.203: 74.8,49.38 OPAMP5:RN1.4 74.93,55.35 v74.8,55.47
  Bottom 0.203: v74.8,55.47 74.8,60.96 67.69,68.07 67.69,71.73 66.47,72.95 32.13,72.95 27.86,68.68 J8.9
S20B  (via drill 0.38)
  Top 0.203: v60.33,41.69 60.33,42.18 OPAMP5:RN3.1
  Bottom 0.203: J9.9 17.5,7.72 17.5,36.17 20.55,39.22 21.36,39.22 24,41.86 33.96,41.86 34.98,40.84 51.03,40.84 52.05,41.86 60.16,41.86 v60.33,41.69
VREF  (via drill 0.56)
  Top 0.203: OPAMP1:U$1.5 21.59,40.01 | 21.59,40.01 22.86,38.73 | 22.86,38.73 OPAMP1:U$1.3 | OPAMP5:U$1.3 72.36,46.99 69.85,46.99 v69.22,47.62 68.58,48.26 OPAMP5:U$1.5 | OPAMP2:U$1.3 22.23,47.62 | OPAMP2:U$1.5 20.95,48.9 22.23,47.62 | OPAMP4:U$1.3 47.62,38.1 46.35,39.37 | 46.35,39.37 OPAMP4:U$1.5 | OPAMP3:U$1.3 47.62,46.99 | 47.62,46.99 46.35,48.26 OPAMP3:U$1.5 | U$1.2 U$1.1 21.61,31.77 22.23,32.38 22.23,38.1 22.86,38.73 | 21.59,40.01 v21.59,42.55 21.59,46.99 22.23,47.62 | 46.35,39.37 46.99,40.01 v46.99,42.55 46.99,46.35 47.62,46.99
  Bottom 0.203: v21.59,42.55 23.5,42.55 24.13,43.18 36.2,43.18 36.83,42.55 v46.99,42.55 64.77,42.55 67.31,45.09 67.31,46.35 68.58,47.62 v69.22,47.62

## Text on the board
tPlace: ^
bPlace: Designed by: David Austin, Matthew Duncan, Michael Dugas